# Altium PCB 12to5IR.PcbDoc
Units mm, origin at the board's own origin, x right, y up, seen from the top; angles counter-clockwise.
Board outline 140 x 70 mm, 2 copper layers (Top Layer, Bottom Layer); 16 components, 6 nets, 29 pads, 0 vias.
Unrouted connection lines stored in the file: 4.
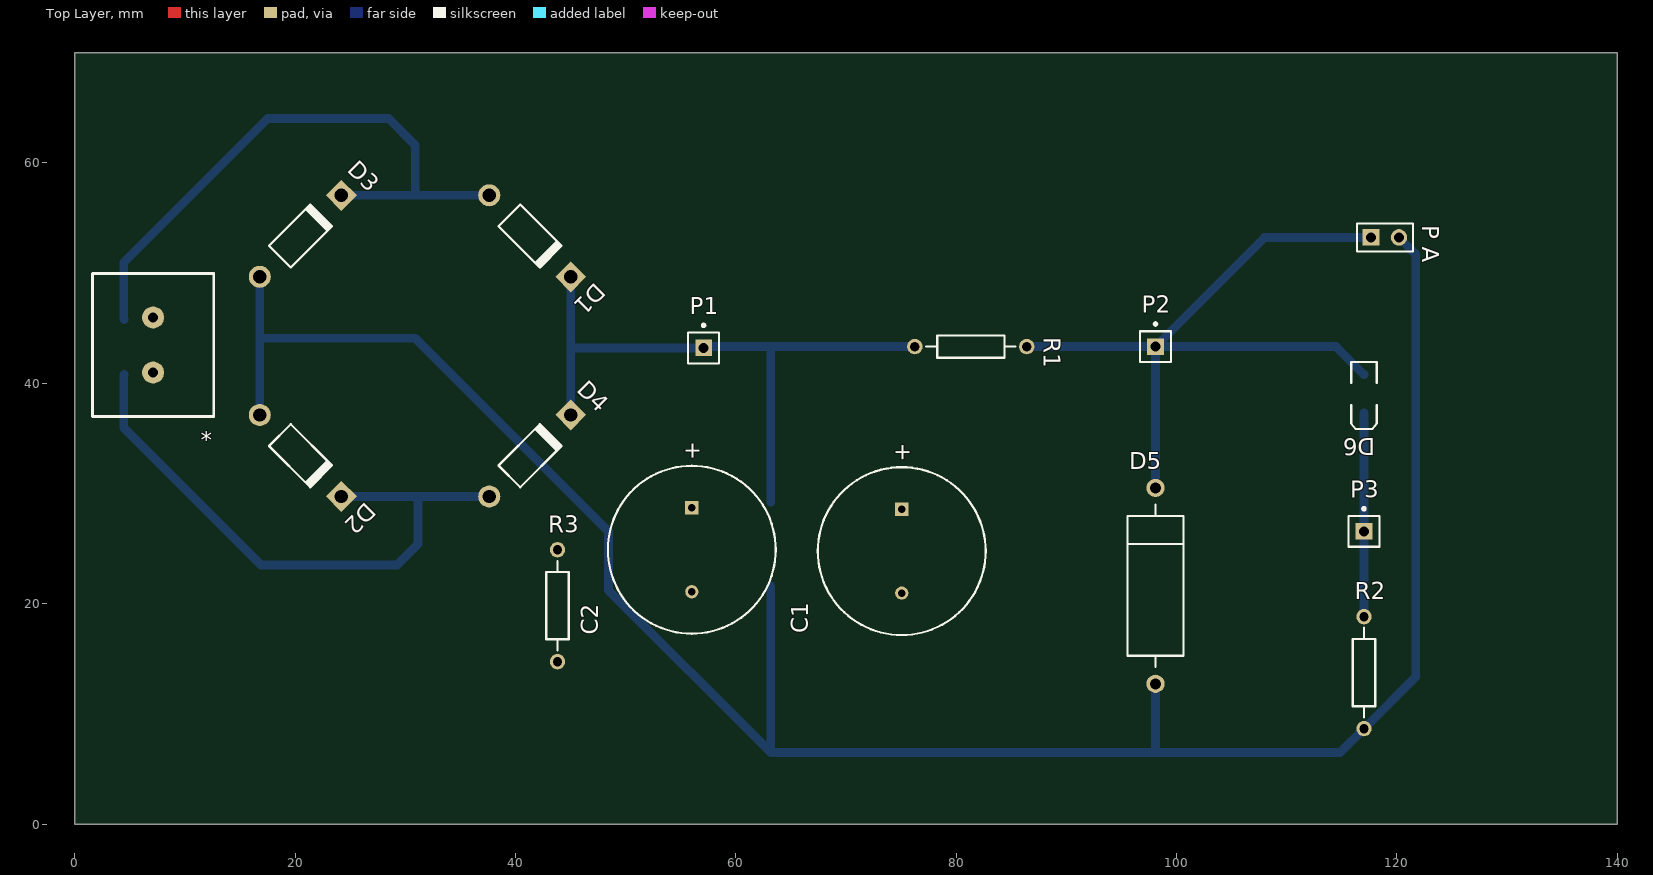
[diagram p0: Top Layer view]
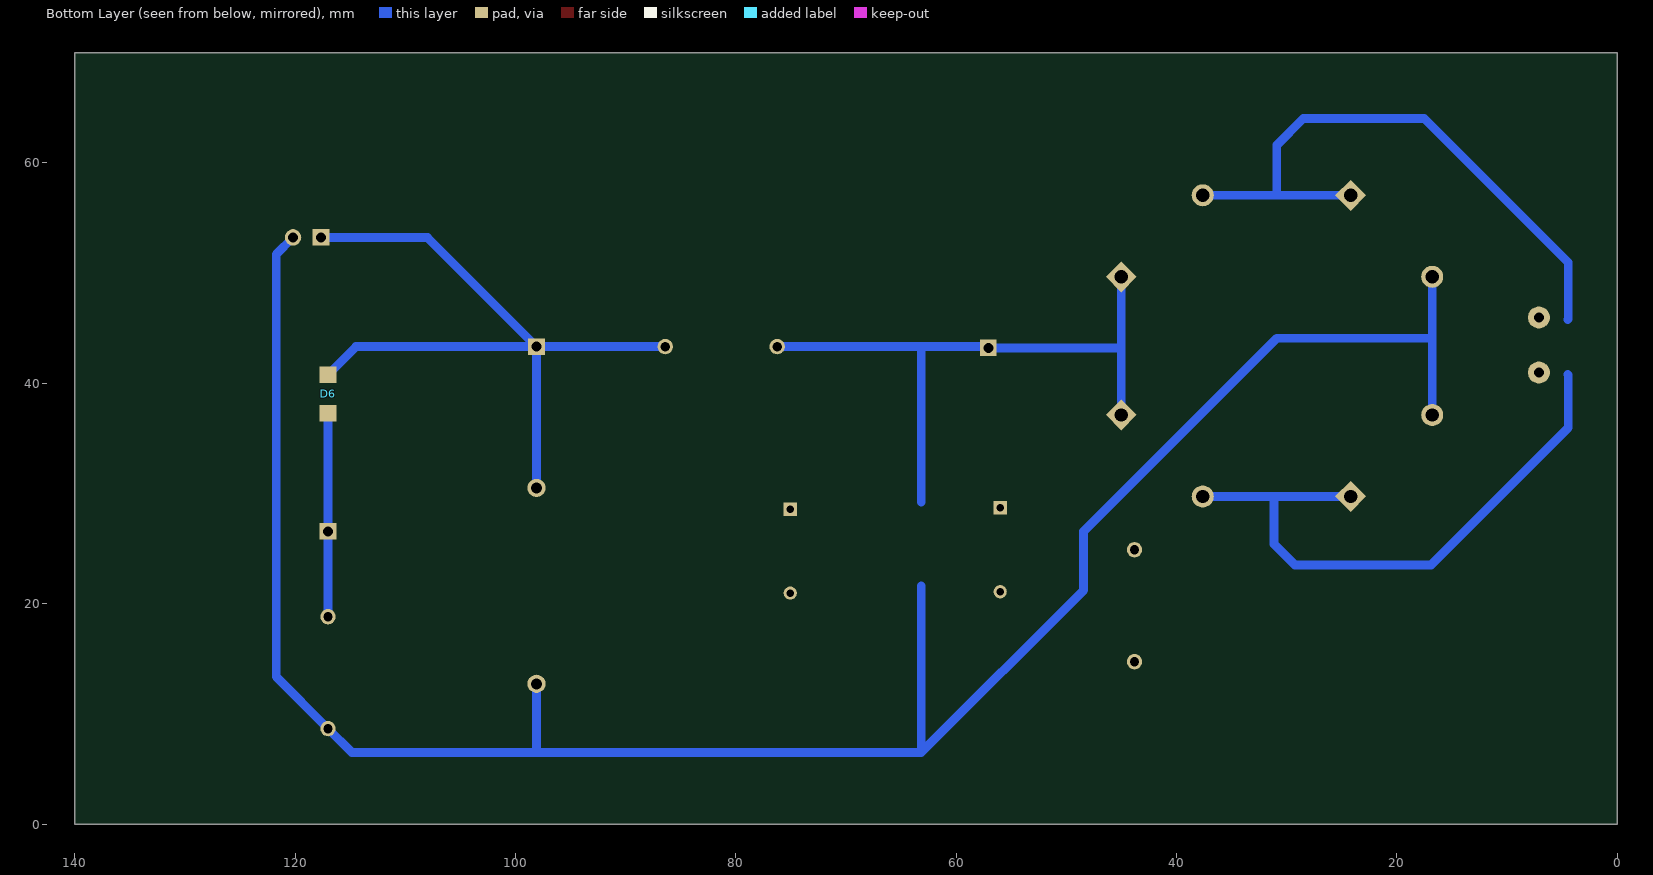
[diagram p1: Bottom Layer view, seen from below]

## Layer stack, top to bottom
Top Solder: solder mask 0.0102, Solder Resist, Dk 3.5
Top Layer: signal copper 0.0356
Dielectric 1: dielectric 0.32, FR-4, Dk 4.8
Bottom Layer: signal copper 0.0356
Bottom Solder: solder mask 0.0102, Solder Resist, Dk 3.5

## Board outline
0,0 0,70 140,70 140,0

## Design rules (kind name [scope] priority, off if disabled: settings)
Clearance [All] p1: gap=0.254 ignorepadtopadclearanceinfootprint=FALSE
PolygonConnect [All] p1: connectstyle=Relief reliefconductorwidth=0.254 reliefentries=4 polygonreliefangle="90 Angle" airgapwidth=0.254
RoutingVias [All] p1: holewidth=0.711 width=1.27 viastyle="Through Hole" minholewidth=0.711 minwidth=1.27 maxholewidth=0.711 maxwidth=1.27
SolderMaskExpansion [All] p1: expansion=0.102 istentingtop=FALSE
SupplyNets "Schematic Supply Nets" [InNet('GND')] p1: voltage=0.000
Width [All] p1: maxlimit=1 minlimit=0.254 preferedwidth=0.8 minimp=50.000000 maximp=50.000000 favimp=50.000000
30 further rules are at their usual default settings.

## Classes and differential pairs
component class 12to5: * C1 D1 D2 D3 D4 D5 D6 P1 P2 P3 "P A" R1 R2

## Components (designator, comment, footprint, x,y, rotation, side; value= is the part's Value field where it differs from the comment)
* "Vin" PCBComponent_1 12.612,49.974 r180 top
C1 "Cap Pol1" RB7.6-15 75.057,24.765 r90 top value=1000uF
C2 "Cap Pol1" RB7.6-15 56.007,24.892 r90 top value=1000uF (schematic designator C1)
D1 "Diode 1N4001" DO-41 41.321,53.363 r315 top
D2 "Diode 1N4001" DO-41 20.493,33.424 r315 top
D3 "Diode 1N4001" DO-41 20.493,53.363 r45 top
D4 "Diode 1N4001" DO-41 41.321,33.424 r45 top
D5 "D Zener" DIODE-0.7 98.09,21.613 r90 top
D6 "LED2" 3.2X1.6X1.1 117.013,39.04 r270 top
P1 "Plug" PIN1 57.069,43.203 r0 top
P2 "Plug" PIN1 98.09,43.33 r0 top
P3 "Plug" PIN1 117.013,26.566 r0 top
"P A" "Header 2" HDR1X2 117.648,53.236 r0 top
R1 "Res2" AXIAL-0.4 81.326,43.33 r0 top value=220
R2 "Res2" AXIAL-0.4 117.013,13.739 r90 top value=220
R3 "Res2" AXIAL-0.4 43.815,19.812 r90 top value=220 (schematic designator R2)

## Footprints (in the part's own frame and the unit in brackets; to place one, negate y for a bottom-side part, rotate by r counter-clockwise, add the part's x,y. Pads: shape width x height; smd on the part's side, far side on the other; paste and mask are expansions set on the pad)
3.2X1.6X1.1 [mm] "SMT LED; 2 Flat Leads"
  rect 1.5x1.5 smd far side: 1(-1.75,0) 2(1.75,0)
  silkscreen extent -2.9,-1.15 3.2,1.15
AXIAL-0.4 [mm] "Axial Device, Thru-Hole; 2 Leads; 0.4 in Pin Spacing"
  round 1.4 hole 0.85: 1(-5.08,0) 2(5.08,0)
  silkscreen extent -4.06,-1.02 4.06,1.02
DIODE-0.7 [mm] "Diode, Thru-Hole; 2 Leads; 0.7 in Pin Spacing"
  round 1.65 hole 1: 1(-8.89,0) 2(8.89,0)
  silkscreen extent -7.37,-2.54 7.37,2.54
DO-41 [mm] "Diode, Axial; Body 5.2 x 2.7 mm (LxDia. max), Lead Dia. 0.86 mm (max)"
  round 2 hole 1.2: 1(-5.23,0)
  rect 2x2 hole 1.2: 2(5.23,0)
  silkscreen extent -2.65,-1.4 2.75,1.4
HDR1X2 [mm] "Connector; Header; 2 Position"
  rect 1.5x1.5 hole 0.9: 1(0,0)
  round 1.5 hole 0.9: 2(2.54,0)
  silkscreen extent -1.27,-1.27 3.81,1.27
PCBComponent_1 [mm]
  round 2 hole 0.9: 1(5.5,4) 2(5.5,9)
  silkscreen extent 0,0 11,13
PIN1 [mm] "Connector; Plug"
  rect 1.5x1.5 hole 0.9: 1(0,0)
  silkscreen extent -1.4,-1.4 1.4,2.17
RB7.6-15 [mm] "Polarized Capacitor (Radial); 2 Leads"
  rect 1.2x1.2 hole 0.7: 1(3.81,0)
  round 1.2 hole 0.7: 2(-3.81,0)
  silkscreen extent -7.62,-7.62 7.62,7.62

## Part data
*: library part CMP-041-000000-1, Design Item ID=Component_1, Source=HeaderCustom0_5.SchLib
C1 C2: library part CMP-001-00085-1, "Polarized Capacitor (Radial)", Case/Package="Polarized Capacitor (Radial); 2 Leads", Component Type=Standard, Design Item ID="Cap Pol1", LatestRevisionDate=17-Jul-2002, LatestRevisionNote="Re-released for DXP Platform.", PackageReference=RB7.6-15, Pins=2, Published=8-Jun-2000, Publisher="Altium Limited", Source="Miscellaneous Devices.SchLib"
D1 D2 D3 D4: library part CMP-004-00044-1, "1 Amp General Purpose Rectifier", Case/Package="Diode, Axial; Body 5.2 x 2.7 mm (LxDia. max), Lead Dia. 0.86 mm (max)", Code_JEDEC=DO-204-AL, Component Type=Standard, ComponentLink1Description="Manufacturer Link", ComponentLink1URL=http://www.fairchildsemi.com/, ComponentLink2Description=Datasheet, ComponentLink2URL=http://www.fairchildsemi.com/ds/1N%2F1N4001.pdf, DatasheetVersion=1998, Design Item ID="Diode 1N4001", LatestRevisionDate=17-Jul-2002, LatestRevisionNote="Re-released for DXP Platform.", PackageReference=DO-41, PackageVersion=Aug-1999, Pins=2, Published=8-Jun-2000, Publisher="Altium Limited", Source="Miscellaneous Devices.SchLib"
D5: library part CMP-004-00037-1, "Zener Diode", Case/Package="Diode, Thru-Hole; 2 Leads; 0.7 in Pin Spacing", Component Type=Standard, Design Item ID="D Zener", LatestRevisionDate=17-Jul-2002, LatestRevisionNote="Re-released for DXP Platform.", PackageReference=DIODE-0.7, Pins=2, Published=8-Jun-2000, Publisher="Altium Limited", Source="Miscellaneous Devices.SchLib"
D6: library part CMP-004-00074-1, "Typical RED, GREEN, YELLOW, AMBER GaAs LED", Case/Package="SM LED; 2 Flat Leads", Component Type=Standard, Design Item ID=LED2, LatestRevisionDate=17-Jul-2002, LatestRevisionNote="Re-released for DXP Platform.", PackageReference=3.2X1.6X1.1, PackageVersion=Feb-2002, Pins=2, Published=8-Jun-2000, Publisher="Altium Limited", Source="Miscellaneous Devices.SchLib"
P1 P2 P3: library part CMP-022-000003-1, Component Type=Standard, Design Item ID=Plug, LatestRevisionDate=17-Jul-2002, LatestRevisionNote="Re-released for DXP Platform.", Pin Count=1, Publisher="Altium Limited", Source="Miscellaneous Connectors.SchLib"
"P A": library part CMP-002-00141-1, "Header, 2-Pin", Component Type=Standard, Design Item ID="Header 2", LatestRevisionDate=17-Jul-2002, LatestRevisionNote="Re-released for DXP Platform.", Pins=2, Publisher="Altium Limited", Source="Miscellaneous Connectors.SchLib"
R1 R2 R3: library part CMP-009-00190-1, "Resistor", Case/Package="Axial Device, Thru-Hole; 2 Leads; 0.4 in Pin Spacing", Component Type=Standard, Design Item ID=Res2, LatestRevisionDate=17-Jul-2002, LatestRevisionNote="Re-released for DXP Platform.", PackageReference=AXIAL-0.4, Pins=2, Published=8-Jun-2000, Publisher="Altium Limited", Source="Miscellaneous Devices.SchLib"

## Nets (pads, with @x,y where several pads share a name; then routed paths per layer and width w, separated by ;. In a path a pad name is that pad's centre, name@x,y a point inside that pad or via, vN(x,y) a via of type N, cw(c..) or ccw(c..) an arc to the next point about the centre after c; other vN are vias at no path point)
GND: "P A.2" C1.2 D2.1 D3.1 D5.1 R2.1 | length 200.8
  Bottom Layer w0.8: D2.1 16.795,44.092 ; D3.1 16.795,44.092 ; 63.165,21.613 63.165,6.5 ; D5.1 98.09,6.5 ; 120.188,53.236 121.712,51.712 121.712,13.358 R2.1 114.854,6.5 98.09,6.5 ; 16.795,44.092 30.907,44.092 48.433,26.566 48.433,21.232 63.165,6.5 ; 63.165,6.5 98.09,6.5
Net*_1: *.1 D1.1 D3.2 | length 56
  Bottom Layer w0.8: 4.491,45.79 4.451,45.83 4.451,50.957 17.525,64.031 28.494,64.031 30.907,61.618 30.907,57.061 ; D3.2 30.907,57.061 ; D1.1 30.907,57.061
Net*_2: *.2 D2.2 D4.1 | length 55.2
  Bottom Layer w0.8: 4.491,40.79 4.451,40.75 4.451,35.957 16.89,23.518 29.256,23.518 31.161,25.423 31.161,29.726 ; D2.2 31.161,29.726 ; D4.1 31.161,29.726
NetC1_1: C1.1 D1.2 D4.2 P1.1 R1.1 | length 57.9
  Bottom Layer w0.8: D4.2 45.019,43.203 ; D1.2 45.019,43.203 ; 63.165,29.233 63.165,43.33 ; R1.1 63.165,43.33 ; 45.019,43.203 P1.1 57.196,43.33 63.165,43.33
NetD5_2: "P A.1" D5.2 D6.1 P2.1 R1.2 | length 68.1
  Bottom Layer w0.8: R1.2 P2.1 ; D5.2 P2.1 ; D6.1 114.473,43.33 P2.1 ; 117.648,53.236 107.996,53.236 P2.1
NetD6_2: D6.2 P3.1 R2.2 | length 18.5
  Bottom Layer w0.8: R2.2 P3.1 D6.2
pads on no net: C2.1 C2.2 R3.1 R3.2

## Silkscreen, mask and mechanical layers (free items; w line width, h text height)
Mechanical 1:
  lines w0.254: 0,0 120,0 120,70 0,70 0,0

## Text inside footprints (layer, text, board x,y; h text height)
C1: Top Overlay "+" at 75.794,32.897 h1.5 r90
C2: Top Overlay "+" at 56.744,33.024 h1.5 r90